# Altium PCB PCB1.PcbDoc
Units mil, origin at the board's own origin, x right, y up, seen from the top; angles counter-clockwise.
Board outline 1771.65 x 984.25 mil, 2 copper layers (Top Layer, Bottom Layer), stack 65.792 mil thick; 29 components, 21 nets, 115 pads, 43 vias.
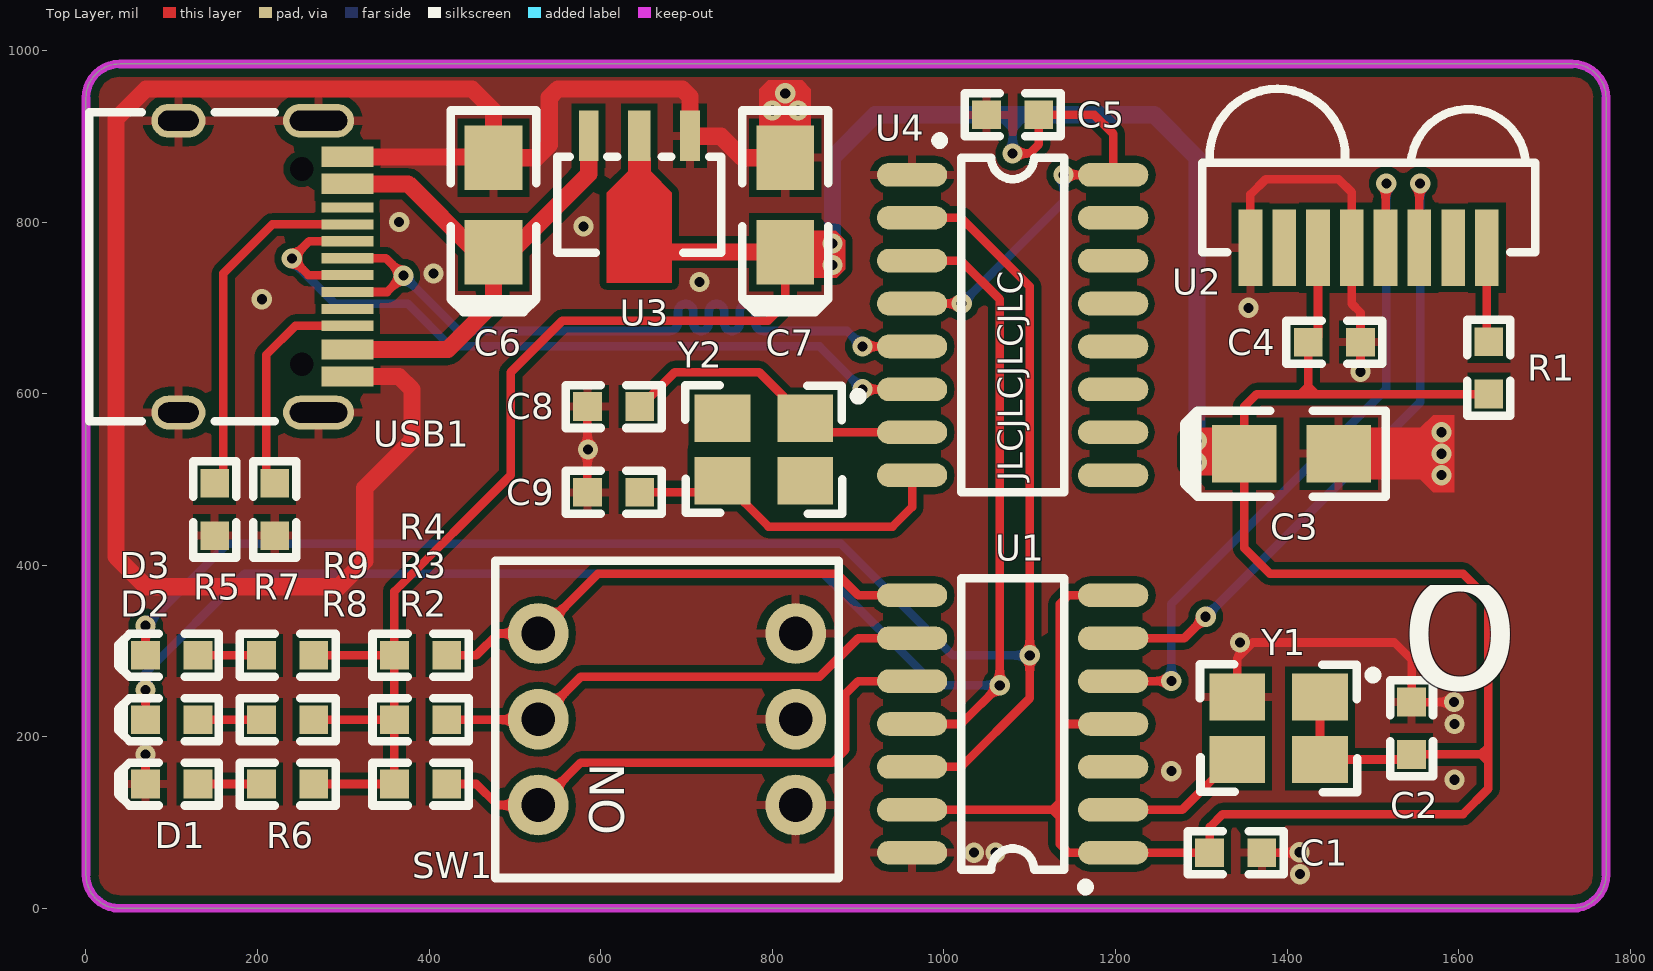
[diagram p0: Top Layer view]
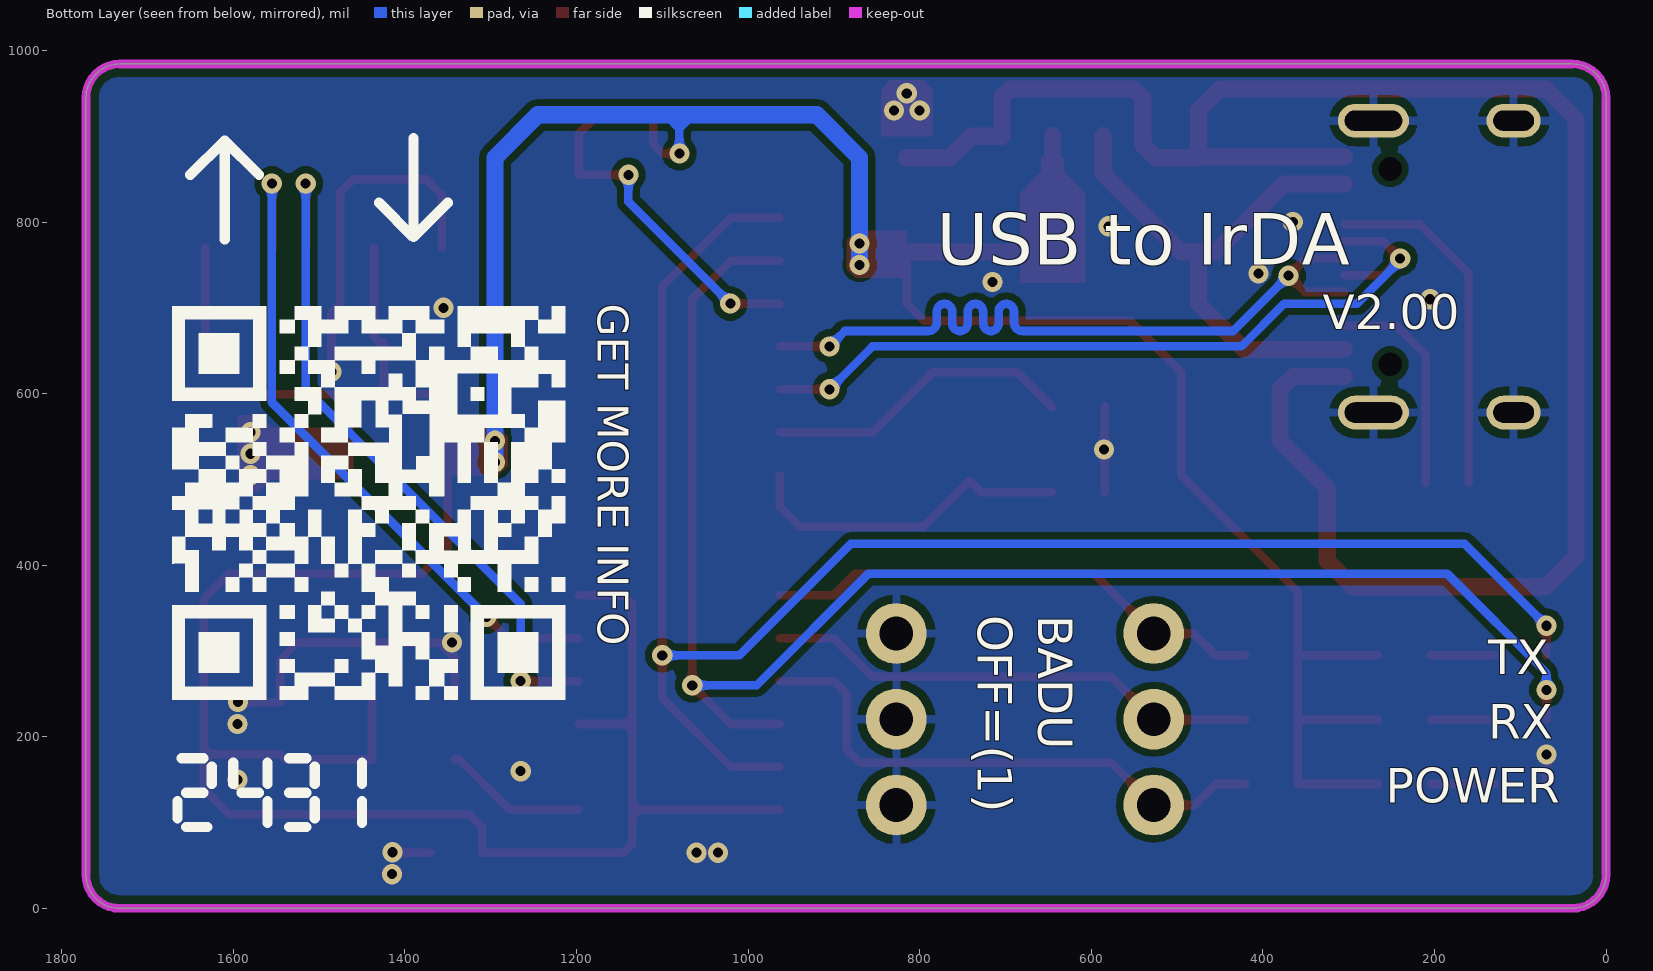
[diagram p1: Bottom Layer view, seen from below]
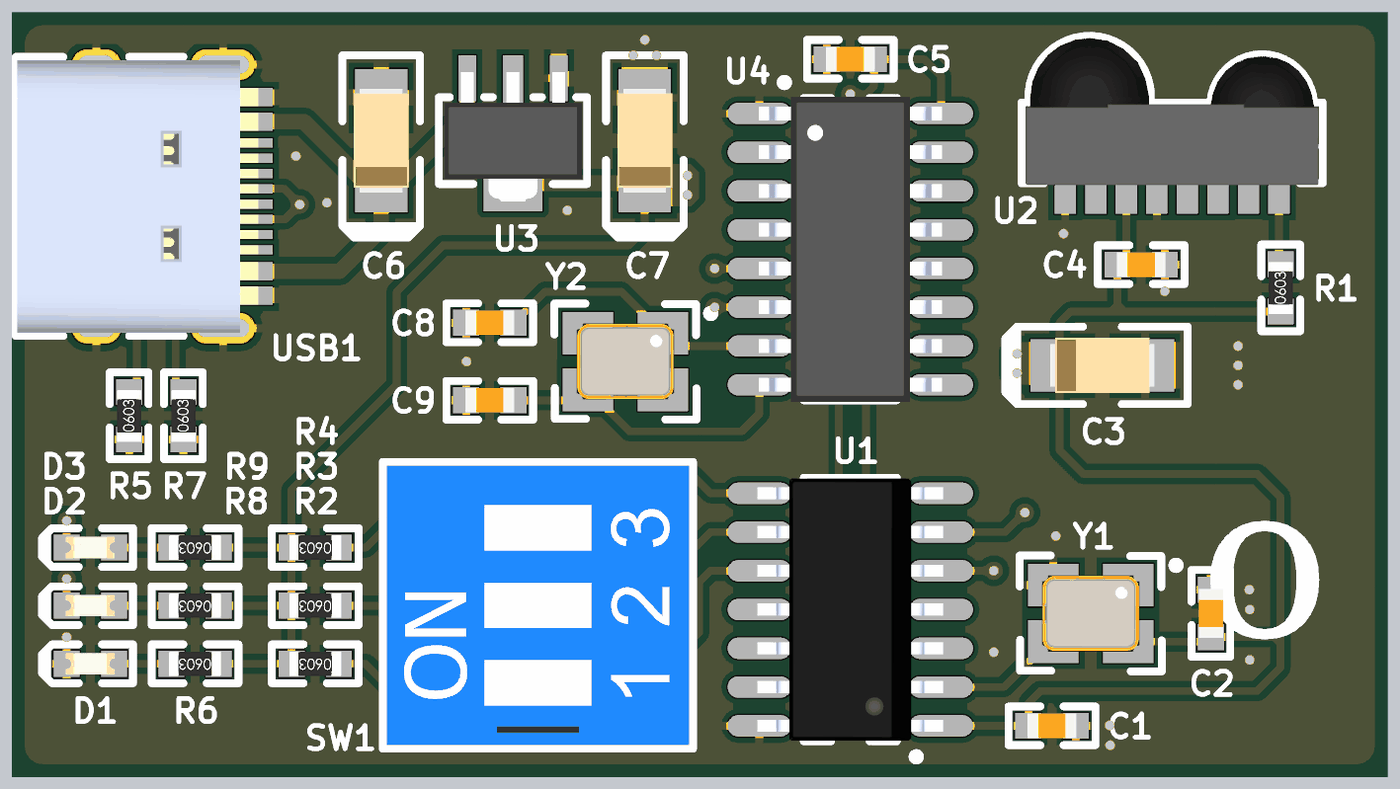
[diagram p2: 3D render of the assembled board from above, using the file's embedded part models]

## Layer stack, top to bottom
Top Solder: solder mask 0.4, Solder Resist, Dk 3.5
Top Layer: signal copper 1.4
Dielectric 1: dielectric 62.9921, FR-4, Dk 4.8
Bottom Layer: signal copper 1.4
Bottom Solder: solder mask 0.4, Solder Resist, Dk 3.5

## Board outline
0,39.37 0,944.88 cw(c39.37,944.88) 39.37,984.25 1732.28,984.25 cw(c1732.28,944.88) 1771.65,944.88 1771.65,39.37 cw(c1732.28,39.37) 1732.28,0 39.37,0 cw(c39.37,39.37)

## Design rules (kind name [scope] priority, off if disabled: settings)
Clearance Clearance_Polygon [InNetClass('All Nets') vs InPolygon] p1: gap=8 ignorepadtopadclearanceinfootprint=FALSE
Clearance Clearance_KeepOut [OnLayer('Keep-Out Layer') vs InPolygon] p2: gap=10 ignorepadtopadclearanceinfootprint=FALSE
Clearance [All] p3: gap=7 ignorepadtopadclearanceinfootprint=FALSE
DiffPairsRouting [All] p1: maxlimit=20 minlimit=8 mostfreqgap=8 toplayer_minwidth=7 toplayer_maxwidth=25 toplayer_prefwidth=20 bottomlayer_minwidth=7 bottomlayer_maxwidth=25 bottomlayer_prefwidth=20 maxuncoupledlength=500
Height [All] p1: minheight=0 maxheight=5000 prefheight=500
HoleSize [All] p1: absolutevalues=TRUE maxlimit=248.03 minlimit=7.87 maxpercent=80.000 minpercent=20.000
MinimumSolderMaskSliver [All] p1: minsoldermaskwidth=3
PlaneConnect [All] p1: pad.planeconnectstyle=Relief pad.reliefexpansion=20 pad.reliefentries=4 pad.reliefconductorwidth=10 pad.reliefairgap=10 via.planeconnectstyle=Direct via.reliefexpansion=20 via.reliefentries=4 via.reliefconductorwidth=10 via.reliefairgap=10
PolygonConnect [All] p1: thpad.connectstyle=Relief thpad.reliefconductorwidth=10 thpad.reliefentries=4 thpad.polygonreliefangle="90 Angle" thpad.airgapwidth=10 smdpad.connectstyle=Relief smdpad.reliefconductorwidth=10 smdpad.reliefentries=4 smdpad.polygonreliefangle="90 Angle" smdpad.airgapwidth=8 via.connectstyle=Direct via.reliefconductorwidth=10 via.reliefentries=4 via.polygonreliefangle="90 Angle" via.airgapwidth=10
RoutingVias [All] p1: holewidth=28 width=472.44 viastyle="Through Hole" minholewidth=11.81 minwidth=19.68 maxholewidth=248.03 maxwidth=50
SilkToSilkClearance [All] p1: silktosilkclearance=0
SilkToSolderMaskClearance [IsPad] p1: minsilkscreentomaskgap=0 clearancetoexposedcopper=TRUE
SolderMaskExpansion [All] p1: expansion=2 istentingtop=FALSE
Width [All] p1: maxlimit=1000 minlimit=6 preferedwidth=10
23 further rules are at their usual default settings.

## Classes and differential pairs
differential pair USB: +USB_P -USB_N

## Components (designator, comment, footprint, x,y, rotation, side; value= is the part's Value field where it differs from the comment)
C1 "0.1uF" 0603-CAP 1340,65 r0 top
C2 "0.1uF" 0603-CAP 1545,210 r270 top
C3 "22uF" 3216-TCAP_M 1405,530 r0 top
C4 "0.1uF" 0603-CAP 1455,660 r180 top
C5 "0.1uF" 0603-CAP 1080,925 r0 top
C6 "10uF" 3216-TCAP_M 475,820 r90 top
C7 "22uF" 3216-TCAP_M 815,820 r90 top
C8 "33pF" 0603-CAP 615,585 r0 top
C9 "33pF" 0603-CAP 615,485 r180 top
D1 "BLUE" 0603-LED 100,145 r0 top
D2 "GREEN" 0603-LED 100,220 r0 top
D3 "RED" 0603-LED 100,295 r0 top
R1 "4.7R" 0603-RES 1635,630 r90 top
R2 "100K" 0603-RES 390,145 r180 top
R3 "100K" 0603-RES 390,220 r180 top
R4 "100K" 0603-RES 390,295 r180 top
R5 "5.1K" 0603-RES 150,465 r90 top
R6 "5.1K" 0603-RES 235,145 r180 top
R7 "5.1K" 0603-RES 220,465 r90 top
R8 "3K" 0603-RES 235,220 r180 top
R9 "680R" 0603-RES 235,295 r180 top
SW1 "SW-DIP-2.54-3P" SWITCH-DIP-2.54-3P 677.17,220.47 r90 top locked
U1 "MCP2120" SOP-14_M 1080,215 r180 top
U2 "IRMT6452" IRMT6452_M 1495,770 r180 top locked
U3 "ASM1117-3V3" SOT-89-3_M 645,820 r180 top
U4 "CH340G" SOP-16_M 1080,680 r0 top
USB1 "Type-C_6P" TYPE-C_16P 190,748.03 r270 top locked
Y1 "3.6864M" CRYSTAL_3225SMD_M 1390,210 r180 top
Y2 "12M" CRYSTAL_3225SMD_M 790,535 r180 top

## Footprints (in the part's own frame and the unit in brackets; to place one, negate y for a bottom-side part, rotate by r counter-clockwise, add the part's x,y. Pads: shape width x height; smd on the part's side, far side on the other; paste and mask are expansions set on the pad)
0603-CAP [mm]
  rect 0.85x0.85 smd: 1(-0.775,0) 2(0.775,0)
  silkscreen extent -1.42,-0.64 1.42,0.64, body extent -0.8,-0.4 0.8,0.4, height 0.7
0603-LED [mm]
  rect 0.85x0.85 smd: 1(-0.775,0) 2(0.775,0)
  silkscreen extent -1.58,-0.64 1.4,0.64, body extent -0.8,-0.35 0.8,0.35, height 0.71
0603-RES [mm]
  rect 0.85x0.85 smd: 1(-0.775,0) 2(0.775,0)
  silkscreen extent -1.42,-0.64 1.42,0.64, body extent -0.85,-0.4 0.85,0.4, height 0.56
3216-TCAP_M [mil]
  rect 75x67.5 smd: 1(-55,0) 2(55,0)
  silkscreen extent -125,-50 110,50, body extent -67,-36 67,36, height 73
CRYSTAL_3225SMD_M [mm]
  rect 1.65x1.4 smd: 1(-1.225,-0.925) 2(1.225,-0.925) 3(1.225,0.925) 4(-1.225,0.925)
  silkscreen extent -2.92,-1.9 2.33,1.9, body extent -1.6,-1.25 1.6,1.25, height 0.61
IRMT6452_M [mm]
  rect 0.7x2.254 smd: 1(-3.5,0) 2(-2.5,0) 3(-1.5,0) 4(-0.5,0) 5(0.5,0) 6(1.5,0) 7(2.5,0) 8(3.5,0)
  silkscreen extent -4.93,-4.7 4.93,0.13, body extent -4.93,-4.64 4.93,0.19, height 4.02
SOP-14_M [mil]
  oval 82x27.56 smd: 1(-117.19,150) 2(-117.19,100) 3(-117.19,50) 4(-117.19,0) 5(-117.19,-50) 6(-117.19,-100) 7(-117.19,-150) 8(117.19,-150) 9(117.19,-100) 10(117.19,-50) 11(117.19,0) 12(117.19,50) 13(117.19,100) 14(117.19,150)
  silkscreen extent -90,-170 60,195, body extent -120,-169 120,169, height 65
SOP-16_M [mil]
  oval 82x27.56 smd: 1(-117.19,175) 2(-117.19,125) 3(-117.19,75) 4(-117.19,25) 5(-117.19,-25) 6(-117.19,-75) 7(-117.19,-125) 8(-117.19,-175) 9(117.19,-175) 10(117.19,-125) 11(117.19,-75) 12(117.19,-25) 13(117.19,25) 14(117.19,75) 15(117.19,125) 16(117.19,175)
  silkscreen extent -90,-195 60,220, body extent -118,-197 118,197, height 71
SOT-89-3_M [mil]
  rect 23x59 smd: 1(-59.06,-80.5) 3(59.06,-80.5)
  rect 26x59 smd: 2(0,-80.5)
  Top Layer region: 13,-55 -13,-55 -13,-39 -38,-14 -38,91 38,91 38,-14 13,-39
  silkscreen extent -96,-56 96,56, body extent -89,-89 89,79, height 61
SWITCH-DIP-2.54-3P [mm]
  round 1.8 hole 1: 1(-2.54,3.81) 2(0,3.81) 3(2.54,3.81) 4(-2.54,-3.81) 5(0,-3.81) 6(2.54,-3.81)
  silkscreen extent -4.7,-5.08 4.7,5.08, body extent -4.57,-4.95 4.57,4.95, height 6.63
TYPE-C_16P [mm]
  oval 1x2.1 hole 0.6 slot 1.7 at 90 deg: 1(-4.32,2.06) 4(4.32,2.06)
  oval 1x1.6 hole 0.6 slot 1.2 at 90 deg: 2(-4.32,-2.09) 3(4.32,-2.09)
  rect 0.6x1.536 smd: A1(-3.25,2.921) A4(-2.45,2.921) B1(3.25,2.921) B4(2.45,2.921)
  rect 0.3x1.536 smd: A5(-1.25,2.921) A6(-0.25,2.921) A7(0.25,2.921) A8(1.25,2.921) B5(1.75,2.921) B6(0.75,2.921) B7(-0.75,2.921) B8(-1.75,2.921)
  round 0 hole 0.7 unplated: ""(-2.89,1.56) ""(2.89,1.56)
  silkscreen extent -4.57,-4.73 4.57,0.76, body extent -4.47,-4.68 4.47,3.22, height 3.22

## Part data
C1 C2 C4 C5 C8 C9: library part CAP-0603
C3 C6 C7: library part CAP-T-3216
D1 D2 D3: library part LED-0603
R1 R2 R3 R4 R5 R6 R7 R8 R9: library part RES-0603
U1: "Infrared Encoder/Decoder"
U2: "4 Mb/s Infrared Data Transceiver"
U3: library part VREG-SOT-89, "Voltage Regular (SOT-89)"
U4: "USB转串口芯片"
Y1: library part XTAL-3225SMD, "oscillator"
Y2: library part XTAL-3225SMD, "crystal"

## Via types
v1: diameter 23.62, hole 11.81, Top Layer to Bottom Layer, tented both sides, 43 vias

## Nets (pads, with @x,y where several pads share a name; then routed paths per layer and width w, separated by ;. In a path a pad name is that pad's centre, name@x,y a point inside that pad or via, vN(x,y) a via of type N, cw(c..) or ccw(c..) an arc to the next point about the centre after c; other vN are vias at no path point)
GND: C1.2 C2.1 C3.2 C4.1 C5.1 C6.2 C7.2 C8.1 C9.2 D1.1 R5.1 R7.1 SW1.4 SW1.5 SW1.6 U1.14 U2.5 U2.8 U3.1 U4.1 USB1.1 USB1.2 USB1.3 USB1.4 USB1.A1 USB1.B1 Y1.2 | length 3234.9
  Top Layer w10: D1.1 v1(69.49,179.49) ; C9.2 584.49,534.49 v1(585,535) 584.49,535.51 C8.1 ; Y1.2 1341.77,291.77 1360,310 1525,310 1545,290 C2.1 v1(1594.49,240.51) ; U2.8 1357.2,832.2 1375,850 1460,850 1475.31,834.69 U2.5 1475.31,704.69 1485.51,694.49 C4.1 v1(1485.51,625.51) ; C1.2 1413.98,65 v1(1414.49,65.51)
  Top Layer w20: USB1.B1 364.92,620.08 380,605 380,545 325,490 325,405 295,375 70,375 35,410 35,920 70,955 450,955 475,930 C6.2 525,875 540,890 540,945 550,955 695,955 704.06,945.94 U3.1 704.56,900 740,900 765,875 C7.2 ; USB1.A1 C6.2@474.02,875.98
  other v1: 1415,40 1035,65 1060,65 1595,150 1265,160 1595,215 1345,310 1580,505 1580,530 1580,555 1355,700 205,710 715,730 405,740 580,795 365,800 800,930 830,930 815,950
NetC6_1: C6.1 U3.3 USB1.A4 USB1.B4 | length 648.2
  Top Layer w20: USB1.B4 421.57,651.57 475,705 C6.1 ; USB1.A4 375.51,844.49 455,765 C6.1 ; U3.3 585.94,855.94 495,765 C6.1
NetC8_2: C8.2 U4.7 Y2.1 | length 363.2
  Top Layer w10: C8.2@645.51,584.25 686.26,625 784.65,625 Y2.1 854.65,555 U4.7
NetC9_1: C9.1 U4.8 Y2.3 | length 391.8
  Top Layer w10: C9.1 728.19,485 Y2.3 795.35,445 940,445 962.81,467.81 U4.8
NetD1_2: D1.2 R6.2 | length 74
  Top Layer w10: D1.2 R6.2
NetD2_2: D2.2 R8.2 | length 74
  Top Layer w10: D2.2 R8.2
NetD3_2: D3.2 R9.2 | length 74
  Top Layer w10: D3.2 R9.2
NetR1_2: R1.2 U2.1 | length 110.4
  Top Layer w10: U2.1 1632.8,662.72 R1.2
NetR2_1: R2.1 SW1.1 U1.10 | length 650.4
  Top Layer w10: R2.1 455,145 479.53,120.47 SW1.1 576.69,170 870,170 885,185 885,250 900,265 U1.10
NetR3_1: R3.1 SW1.2 U1.9 | length 581.6
  Top Layer w10: R3.1 526.69,220 SW1.2 576.69,270 855,270 900,315 U1.9
NetR4_1: R4.1 SW1.3 U1.8 | length 592
  Top Layer w10: R4.1 455,295 480.47,320.47 SW1.3 596.69,390 875,390 900,365 U1.8
NetR5_2: R5.2 USB1.A5 | length 413.2
  Top Layer w10: R5.2@160,495.51 160,740 217.24,797.24 USB1.A5
NetR7_2: R7.2 USB1.B5 | length 258.6
  Top Layer w10: R7.2@210,495.51 210,645 244.13,679.13 USB1.B5
NetU1_2: U1.2 Y1.3 | length 168.8
  Top Layer w10: U1.2 1277.77,115 1336.35,173.58 Y1.3
RXD: D2.1 U1.11 U4.3 | length 1843.4
  Top Layer w10: D2.1 v1(69.49,254.49) ; U1.11 1020,215 v1(1065,260) 1065,710 1020,755 U4.3
  Bottom Layer w10: v1(69.49,254.49) 69.49,274.49 185,390 860,390 990,260 v1(1065,260)
RXIR: U1.5 U2.4 | length 827
  Top Layer w10: U1.5 v1(1265,265) ; U2.4 1514.68,844.06 v1(1515.63,845)
  Bottom Layer w10: v1(1265,265) 1265,355 1515.63,605.63 v1(1515.63,845)
TXD: D3.1 U1.12 U4.2 | length 1979.1
  Top Layer w10: D3.1 v1(69.49,329.49) ; U1.12 1020,165 1100,245 v1(1100,295) 1100,725 1020,805 U4.2
  Bottom Layer w10: v1(69.49,329.49) 165,425 880,425 1010,295 v1(1100,295)
TXIR: U1.6 U2.3 | length 802.1
  Top Layer w10: U1.6 1280,315 v1(1305,340) ; U2.3 1554.06,844.06 v1(1555,845)
  Bottom Layer w10: v1(1305,340) 1555,590 v1(1555,845)
USB_N: U4.6 USB1.A7 USB1.B7 | length 933.8
  Top Layer w10: USB1.A7 259.31,738.19 v1(240,757.5) 260.06,777.56 USB1.B7 ; v1(905,605) U4.6
  Bottom Layer w10: v1(240,757.5) 240,755 290,705 375,705 425,655 855,655 v1(905,605)
USB_P: U4.5 USB1.A6 USB1.B6 | length 915.9
  Top Layer w10: USB1.B6 351,718.5 v1(370,737.5) 349.63,757.87 USB1.A6 ; v1(905,655) U4.5
  Bottom Layer w10: v1(370,737.5) 434.5,673 675,673 680,673 ccw(c680,683) 690,683 690,695.64 cw(c699,695.64) 708,695.64 708,682 ccw(c717,682) 726,682 726,695.64 cw(c735,695.64) 744,695.64 744,682 ccw(c753,682) 762,682 762,695.64 cw(c771,695.64) 780,695.64 780,683 ccw(c790,683) 790,673 814.91,673 887,673 v1(905,655)
VCC: C1.1 C2.2 C3.1 C4.2 C5.2 C7.1 R1.1 R2.2 R3.2 R4.2 R6.1 R8.1 R9.1 U1.1 U1.4 U1.7 U1.13 U2.6 U3.2 U4.4 U4.16 Y1.1 Y1.4 | length 5620.1
  Top Layer w10: R6.1 R2.2 R3.2 ; R8.1 R3.2 ; R9.1 R4.2 ; C7.1 815,705 795,685 555,685 495,625 495,505 359.49,369.49 R4.2 ; U1.13 1135,115 ; U4.4 v1(1020.62,705) ; v1(1080,880) 1100,880 1110.51,890.51 C5.2 1175,925 1197.19,902.81 U4.16 v1(1139.38,855) ; U1.4 1135,215 ; U1.7 1145,365 1135,355 1135,215 ; 1424.49,600 C4.2 ; C4.2@1429.49,660 1435.94,666.46 U2.6 ; Y1.1 Y1.4 1539.09,173.58 C2.2 1634.49,179.49 ; R1.1 1424.49,599.49 1364.49,599.49 1350,585 C3.1 1350,420 1380,390 1605,390 1634.49,360.51 1634.49,179.49 ; R3.2 R4.2 ; 1135,115 1135,215 ; 1135,115 1135,75 1145,65 U1.1 1310,65 1310,95 1325,110 1605,110 1634.49,139.49 1634.49,179.49
  Top Layer w20: U3.2 645,765 C7.1
  Bottom Layer w10: v1(1020.62,705) 1139.38,823.76 v1(1139.38,855) ; v1(1080,880) 1080,922.5 1082.5,925
  Bottom Layer w20: v1(870,750) v1(870,775) 870,875 920,925 1082.5,925 1245,925 1295,875 v1(1295,545) v1(1295,520)
pads on no net: U1.3 U2.2 U2.7 U4.9 U4.10 U4.11 U4.12 U4.13 U4.14 U4.15 USB1. USB1.A8 USB1.B8 Y2.2 Y2.4

## Polygon pours and split planes (outlines as drawn)
GND on Top Layer "NONET_L-01_P-001" (solid, remove dead copper, pour order 0): 0,0 1775,0 1775,985 0,985
GND on Bottom Layer "NONET_L-01_P-001" (solid, remove dead copper, pour order 1): 0,0 1775,0 1775,985 0,985

## Keep-outs
Keep-Out Layer:
  the board outline again, w10

## Other copper
Top Layer:
  region net VCC: 1619.49,179.49 1634.49,164.49 1634.49,194.49
  region net GND: 1460,560 1555,560 1570,575 1595,575 1595,485 1570,485 1555,500 1460,500
  region net GND: 785,900 785,955 795,965 835,965 845,955 845,900
  region net VCC: 1424.49,615 1409.49,600 1439.49,600
  region net VCC: 885,745 875,735 815,735 815,790 873.97,790 885,778.97
  region net VCC: 1280,550 1290,560 1350,560 1350,505 1291.03,505 1280,516.03
  region net VCC: 1120,115 1135,100 1135,130
  region net VCC: 1150,215 1135,230 1135,200
Bottom Layer:
  region net VCC: 1080,902.5 1100,922.5 1060,922.5

## Silkscreen, mask and mechanical layers (free items; w line width, h text height)
Top Overlay:
  text "JLCJLCJLCJLC" at 1092,498 h29 r90
  text "o" at 1530,180.32 h400
Bottom Overlay:
  drawing of 89 lines, arcs and shapes, not listed
  text "USB to IrDA" at 780,750 h60
  text "GET MORE INFO" at 1175,705 h36 r90
  text "V2.00" at 330,675 h40
  text "BADU" at 662,342 h40 r90
  text "OFF=(1)" at 732,342 h40 r90
  text "TX" at 137,273 h40
  text "RX" at 137,198 h40
  text "POWER" at 257,123 h40
Mechanical 1:
  the board outline again, w10
Drill Drawing:
  text ".Legend" at 1995,24.99 h60

## Text inside footprints (layer, text, board x,y; h text height)
SW1: Top Overlay "ON" at 627.17,85.47 h40 r90